# Altium PCB bms_afe_tester-1_1.PcbDoc (part 6 of 6)
Units mm, origin at the board's own origin, x right, y up, seen from the top; angles counter-clockwise.
Board outline 410 x 67 mm, 4 copper layers (L1, L2, L3, L4), stack 1.586 mm thick; 598 components, 356 nets, 1901 pads, 1542 vias.
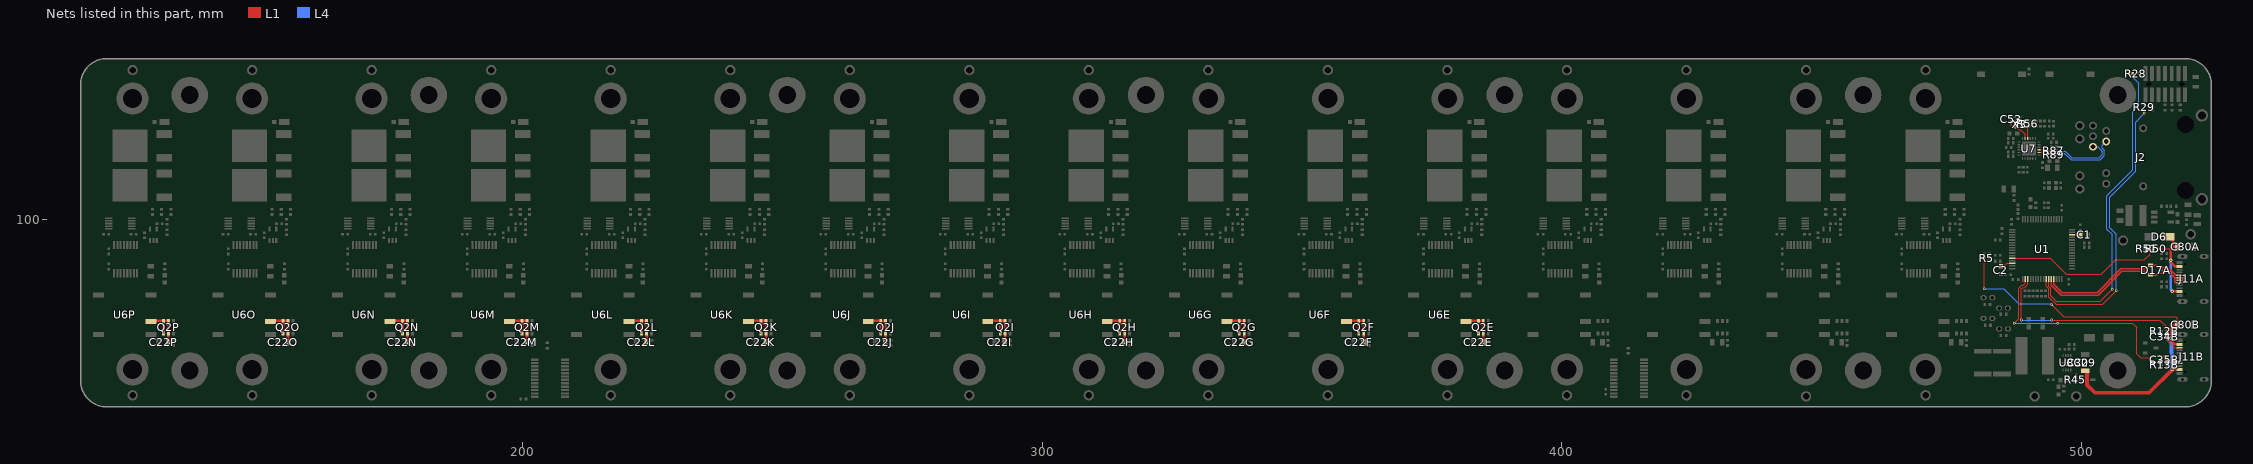
[diagram p7: the nets of this part, all layers, seen from the top]

## Via types
v1: diameter 0.5, hole 0.3, L1 to L4, 1524 vias
v2: diameter 0.65, hole 0.3, L1 to L4, 10 vias
v3: diameter 0.9, hole 0.6, L1 to L4, 8 vias

## Nets (pads, with @x,y where several pads share a name; then routed paths per layer and width w, separated by ;. In a path a pad name is that pad's centre, name@x,y a point inside that pad or via, vN(x,y) a via of type N, cw(c..) or ccw(c..) an arc to the next point about the centre after c; other vN are vias at no path point) (continued)
SWITCHEDE: C22E.1 Q2E.1 Q2E.2 Q2E.5 Q2E.6 U6E.2 | length 10
  L1 w0.5: U6E.2@381.55,80.43 381.645,80.525 Q2E.6@383.95,80.525 ; Q2E.1@383.95,78.075 Q2E.6@383.95,80.525 ; C22E.1@384.85,76.4 384.9,76.45 Q2E.2@384.9,78.075 Q2E.5@384.9,80.525 Q2E.6@383.95,80.525
SWITCHEDF: C22F.1 Q2F.1 Q2F.2 Q2F.5 Q2F.6 U6F.2 | length 10
  L1 w0.5: U6F.2@358.55,80.43 358.645,80.525 Q2F.6@360.95,80.525 ; Q2F.1@360.95,78.075 Q2F.6@360.95,80.525 ; C22F.1@361.85,76.4 361.9,76.45 Q2F.2@361.9,78.075 Q2F.5@361.9,80.525 Q2F.6@360.95,80.525
SWITCHEDG: C22G.1 Q2G.1 Q2G.2 Q2G.5 Q2G.6 U6G.2 | length 10
  L1 w0.5: U6G.2@335.55,80.43 335.645,80.525 Q2G.6@337.95,80.525 ; Q2G.1@337.95,78.075 Q2G.6@337.95,80.525 ; C22G.1@338.85,76.4 338.9,76.45 Q2G.2@338.9,78.075 Q2G.5@338.9,80.525 Q2G.6@337.95,80.525
SWITCHEDH: C22H.1 Q2H.1 Q2H.2 Q2H.5 Q2H.6 U6H.2 | length 10
  L1 w0.5: U6H.2@312.55,80.43 312.645,80.525 Q2H.6@314.95,80.525 ; Q2H.1@314.95,78.075 Q2H.6@314.95,80.525 ; C22H.1@315.85,76.4 315.9,76.45 Q2H.2@315.9,78.075 Q2H.5@315.9,80.525 Q2H.6@314.95,80.525
SWITCHEDI: C22I.1 Q2I.1 Q2I.2 Q2I.5 Q2I.6 U6I.2 | length 10
  L1 w0.5: U6I.2@289.55,80.43 289.645,80.525 Q2I.6@291.95,80.525 ; Q2I.1@291.95,78.075 Q2I.6@291.95,80.525 ; C22I.1@292.85,76.4 292.9,76.45 Q2I.2@292.9,78.075 Q2I.5@292.9,80.525 Q2I.6@291.95,80.525
SWITCHEDJ: C22J.1 Q2J.1 Q2J.2 Q2J.5 Q2J.6 U6J.2 | length 10
  L1 w0.5: U6J.2@266.55,80.43 266.645,80.525 Q2J.6@268.95,80.525 ; Q2J.1@268.95,78.075 Q2J.6@268.95,80.525 ; C22J.1@269.85,76.4 269.9,76.45 Q2J.2@269.9,78.075 Q2J.5@269.9,80.525 Q2J.6@268.95,80.525
SWITCHEDK: C22K.1 Q2K.1 Q2K.2 Q2K.5 Q2K.6 U6K.2 | length 10
  L1 w0.5: U6K.2@243.55,80.43 243.645,80.525 Q2K.6@245.95,80.525 ; Q2K.1@245.95,78.075 Q2K.6@245.95,80.525 ; C22K.1@246.85,76.4 246.9,76.45 Q2K.2@246.9,78.075 Q2K.5@246.9,80.525 Q2K.6@245.95,80.525
SWITCHEDL: C22L.1 Q2L.1 Q2L.2 Q2L.5 Q2L.6 U6L.2 | length 10
  L1 w0.5: U6L.2@220.55,80.43 220.645,80.525 Q2L.6@222.95,80.525 ; Q2L.1@222.95,78.075 Q2L.6@222.95,80.525 ; C22L.1@223.85,76.4 223.9,76.45 Q2L.2@223.9,78.075 Q2L.5@223.9,80.525 Q2L.6@222.95,80.525
SWITCHEDM: C22M.1 Q2M.1 Q2M.2 Q2M.5 Q2M.6 U6M.2 | length 10
  L1 w0.5: U6M.2@197.55,80.43 197.645,80.525 Q2M.6@199.95,80.525 ; Q2M.1@199.95,78.075 Q2M.6@199.95,80.525 ; C22M.1@200.85,76.4 200.9,76.45 Q2M.2@200.9,78.075 Q2M.5@200.9,80.525 Q2M.6@199.95,80.525
SWITCHEDN: C22N.1 Q2N.1 Q2N.2 Q2N.5 Q2N.6 U6N.2 | length 10
  L1 w0.5: U6N.2@174.55,80.43 174.645,80.525 Q2N.6@176.95,80.525 ; Q2N.1@176.95,78.075 Q2N.6@176.95,80.525 ; C22N.1@177.85,76.4 177.9,76.45 Q2N.2@177.9,78.075 Q2N.5@177.9,80.525 Q2N.6@176.95,80.525
SWITCHEDO: C22O.1 Q2O.1 Q2O.2 Q2O.5 Q2O.6 U6O.2 | length 10
  L1 w0.5: U6O.2@151.55,80.43 151.645,80.525 Q2O.6@153.95,80.525 ; Q2O.1@153.95,78.075 Q2O.6@153.95,80.525 ; C22O.1@154.85,76.4 154.9,76.45 Q2O.2@154.9,78.075 Q2O.5@154.9,80.525 Q2O.6@153.95,80.525
SWITCHEDP: C22P.1 Q2P.1 Q2P.2 Q2P.5 Q2P.6 U6P.2 | length 10
  L1 w0.5: U6P.2@128.55,80.43 128.645,80.525 Q2P.6@130.95,80.525 ; Q2P.1@130.95,78.075 Q2P.6@130.95,80.525 ; C22P.1@131.85,76.4 131.9,76.45 Q2P.2@131.9,78.075 Q2P.5@131.9,80.525 Q2P.6@130.95,80.525
TX_N: J2.2 R89.2 U7.20 | length 17.6
  L1 w0.218: U7.20@491.85,112.95 492.45,112.95 492.8,112.6 v1(493.4,112.6) R89.2@494.1,112.6
  L4 w0.218: v1(493.4,112.6) 493.591,112.791 496.7,112.791 497.991,111.5 503.591,111.5 504.418,112.327 504.418,113.373 503.996,113.796 503.996,114.284 J2.2@504.76,115.048
TX_P: J2.9 R87.2 U7.21 | length 17.3
  L1 w0.218: U7.21@491.85,113.45 492.75,113.45 v1(492.8,113.4) 494.1,113.4 R87.2@494.2,113.3
  L4 w0.218: v1(492.8,113.4) 492.991,113.209 496.873,113.209 498.164,111.918 503.418,111.918 504,112.5 504,113.2 503.168,114.032 J2.9@502.22,114.032
UART1_VCP_RX_2: R28.1 U1.43 | length 62.5
  L1 w0.203: U1.43@493.7,88.6 493.7,87.201 494.075,86.826 494.075,85.325 495.1,84.3 503.6,84.3 v1(505.9,86.6) ; v1(509.2,128.1) R28.1@509.9,128.1
  L4 w0.203: v1(505.9,86.6) 505.9,97.2 504.9,98.2 504.9,104.6 509.9,109.6 509.9,120.8 511,121.9 511,126.3 v1(509.2,128.1)
UART1_VCP_TX_2: R29.1 U1.42 | length 56.5
  L1 w0.2: U1.42@493.2,88.6 493.2,87.2 493.7,86.7 493.7,85.1 495.1,83.7 504.1,83.7 v1(506.7,86.3) ; v1(512.1,120.5) R29.1@512.1,121.1
  L4 w0.2: v1(506.7,86.3) 506.7,97.2 505.4,98.5 505.4,104.3 510.4,109.3 510.4,118.8 v1(512.1,120.5)
UCPD1.CC1_1: C35B.1 J11B.A5 R13B.1 U1.34 | length 49.3
  L1 w0.2: v1(487.1,80.1) 487.9,80.9 487.9,86.8 488.5,87.4 488.8,87.4 489.2,87.8 U1.34@489.2,88.6 ; v1(495.4,80.1) 509.8,80.1 510.6,79.3 510.6,74.2 511.4,73.4 513,73.4 513.5,73.9 516.2,73.9 516.4,73.7 C35B.1@516.4,73.1 ; R13B.1@516.4,72.1 C35B.1@516.4,73.1 ; J11B.A5@518.85,72.35 518.05,72.35 517.3,73.1 C35B.1@516.4,73.1
  L4 w0.2: v1(487.1,80.1) v1(495.4,80.1)
UCPD1.CC2_1: C34B.1 J11B.B5 R12B.1 U1.35 | length 42.9
  L1 w0.2: v1(488.4,80.7) 488.4,86.7 488.6,86.9 489,86.9 489.7,87.6 U1.35@489.7,88.6 ; v1(494.3,80.7) 515.1,80.7 516.4,79.4 R12B.1@516.4,78.5 C34B.1@516.4,77.5 516.4,76.8 517.85,75.35 J11B.B5@518.85,75.35
  L4 w0.2: v1(488.4,80.7) v1(494.3,80.7)
USB._1_N: D17A.2 J11A.A7 J11A.B7 U1.44 | length 31.4
  L1 w0.284: U1.44@494.2,88.6 494.208,88.592 494.208,87.383 496.1,85.491 503.225,85.491 507.792,90.058 512.567,90.058 D17A.2@513.275,89.35 514.375,89.35 514.731,89.706 515.973,89.706 516.325,90.058 516.717,90.058 517.925,88.85 ; J11A.B7@518.85,87.85 518.125,87.85 517.925,88.05 517.925,88.85 ; J11A.A7@518.85,88.85 517.925,88.85
USB._1_P: D17A.1 J11A.A6 J11A.B6 U1.45 | length 31.3
  L1 w0.2: J11A.A6@518.85,88.35 519.55,88.35 519.7,88.5 519.7,89.2 519.55,89.35 J11A.B6@518.85,89.35
  L1 w0.284: U1.45@494.7,88.6 494.692,88.592 494.692,87.583 496.3,85.975 503.025,85.975 507.592,90.542 512.567,90.542 D17A.1@513.275,91.25 514.375,91.25 514.731,90.894 515.925,90.894 516.277,90.542 516.917,90.542 518.109,89.35 J11A.B6@518.85,89.35
VBUS: C29.1 C30.1 C80B.1 J11B.A4 J11B.B4 R5.2 R45.1 U8.1 | length 84.5
  L1 w0.2: v1@481.3,86.6 R5.2@481.3,92.6 ; v1(494.3,83.6) 496.6,81.3 518.2,81.3 518.45,81.05 C80B.1@518.45,79.8 ; R45.1@498.8,69.7 499,69.9 499,70.5
  L1 w0.3: U8.1@497.7,72 C30.1@499.4,72
  L1 w0.5: v2(517.5,71.2) J11B.A4@518.85,71.2 ; C80B.1@518.45,79.8 517.6,79.8 517.2,79.4 v2(517.2,77.2) 517.2,76.8 518,76 J11B.B4@518.85,76
  L1 w0.75: C29.1@500.7,70.95 501.1,70.55 501.1,68.2 502.6,66.7 513,66.7 v2(517.5,71.2)
  L4 w0.2: v1(481.3,86.7) 485,86.7 487.9,83.8 494.1,83.8 v1(494.3,83.6)
  L4 w0.75: v2(517.2,77.2) v2(517.5,71.2)
VBUS_DATA_1: C80A.1 D6.1 J11A.A4 J11A.B4 R50.2 | length 18
  L1 w0.2: R50.2@514.9,94.4 517.2,94.4
  L1 w0.5: D6.1@516.85,96.7 517.6,95.95 517.6,94.8 ; v2(517.5,86.2) J11A.A4@518.85,86.2 ; C80A.1@518.45,94.8 517.6,94.8 ; J11A.B4@518.85,91 518,91 517.2,91.8 v2(517.2,92.2) 517.2,94.4 517.6,94.8
  L4 w0.5: v2(517.2,92.2) 517.2,86.5 v2(517.5,86.2)
VBUS_DATA_SENSE_1: R50.1 R51.2 U1.28 | length 31.2
  L1 w0.2: U1.28@486.7,92.6 494,92.6 497.1,89.5 503.8,89.5 506.6,92.3 512.1,92.3 513.1,93.3 R51.2@513.1,94.4 R50.1@513.9,94.4
VCAP_1_2: C2.1 U1.30 | length 2.4
  L1 w0.2: C2.1@484.5,91.05 485.05,91.05 485.6,91.6 U1.30@486.7,91.6
VCAP_2_2: C1.1 U1.62 | length 1.6
  L1 w0.203: U1.62@498.2,97.1 C1.1@499.75,97.1
XTAL1: C53.1 U7.5 X3.3 | length 4.8
  L1 w0.203: C53.1@486.5,118.8 486.5,118.1 486.7,117.9 X3.3@487.425,117.9 488.025,117.3 488.3,117.3 489.15,116.45 U7.5@489.15,115.65
XTAL2: R56.1 U7.4 | length 2.4
  L1 w0.218: U7.4@489.65,115.65 489.65,117.95 R56.1@489.7,118
pads on no net: J1.0 J1.1 J1.2 J1.9 J1.10 J2.0 J2.5 J2.6 J2.10 J2.11 J11A.A8 J11A.B8 J11A.GP J11B.A8 J11B.B8 J11B.GP MH1.1 MH2.1 MH3.1 MH4.1 MH5.1 MH6.1 MH7.1 MH8.1 MH9.1 MH10.1 MH11.1 MH12.1 MH13.1 MH14.1 U1.2 U1.3 U1.4 U1.8 U1.10 U1.14 U1.20 U1.22 U1.26 U1.50 U1.51 U1.52 U1.53 U1.54 U1.56 U1.57 U1.61 U4A.6 U4B.6 U4C.6 U4D.6 U4E.6 U4F.6 U4G.6 U4H.6 U4I.6 U4J.6 U4K.6 U4L.6 U4M.6 U4N.6 U4O.6 U4P.6 U5A.3 U5A.9 U5B.3 U5B.9 U5C.3 U5C.9 U5D.3 U5D.9 U5E.3 U5E.9 U5F.3 U5F.9 U5G.3 U5G.9 U5H.3 U5H.9 U5I.3 U5I.9 U5J.3 U5J.9 U5K.3 U5K.9 U5L.3 U5L.9 U5M.3 U5M.9 U5N.3 U5N.9 U5O.3 U5O.9 U5P.3 U5P.9 U6A.8 U6B.8 U6C.8 U6D.8 U6E.8 U6F.8 U6G.8 U6H.8 U6I.8 U6J.8 U6K.8 U6L.8 U6M.8 U6N.8 U6O.8 U6P.8 U7.10 U8.3 U8.6

## Polygon pours and split planes (outlines as drawn)
BIASE on L1 "NONET_L01_P-001" (solid, remove dead copper, pour order 77): 380.9,110.2 370.1,110.2 370.1,85 372.5,85 372.5,95 373.9,95 373.9,96.5 371.9,96.5 371.9,101 380.9,101
BIASP on L1 "NONET_L01_P-001" (solid, remove dead copper, pour order 76): 127.9,110.2 117.1,110.2 117.1,85 119.5,85 119.5,95 120.9,95 120.9,96.5 118.9,96.5 118.9,101 127.9,101
BIASO on L1 "NONET_L01_P-001" (solid, remove dead copper, pour order 75): 150.9,110.2 140.1,110.2 140.1,85 142.5,85 142.5,95 143.9,95 143.9,96.5 141.9,96.5 141.9,101 150.9,101
BIASN on L1 "NONET_L01_P-001" (solid, remove dead copper, pour order 74): 173.9,110.2 163.1,110.2 163.1,85 165.5,85 165.5,95 166.9,95 166.9,96.5 164.9,96.5 164.9,101 173.9,101
BIASM on L1 "NONET_L01_P-001" (solid, remove dead copper, pour order 73): 196.9,110.2 186.1,110.2 186.1,85 188.5,85 188.5,95 189.9,95 189.9,96.5 187.9,96.5 187.9,101 196.9,101
BIASL on L1 "NONET_L01_P-001" (solid, remove dead copper, pour order 72): 219.9,110.2 209.1,110.2 209.1,85 211.5,85 211.5,95 212.9,95 212.9,96.5 210.9,96.5 210.9,101 219.9,101
BIASK on L1 "NONET_L01_P-001" (solid, remove dead copper, pour order 71): 242.9,110.2 232.1,110.2 232.1,85 234.5,85 234.5,95 235.9,95 235.9,96.5 233.9,96.5 233.9,101 242.9,101
BIASJ on L1 "NONET_L01_P-001" (solid, remove dead copper, pour order 70): 265.9,110.2 255.1,110.2 255.1,85 257.5,85 257.5,95 258.9,95 258.9,96.5 256.9,96.5 256.9,101 265.9,101
BIASI on L1 "NONET_L01_P-001" (solid, remove dead copper, pour order 69): 288.9,110.2 278.1,110.2 278.1,85 280.5,85 280.5,95 281.9,95 281.9,96.5 279.9,96.5 279.9,101 288.9,101
BIASH on L1 "NONET_L01_P-001" (solid, remove dead copper, pour order 68): 311.9,110.2 301.1,110.2 301.1,85 303.5,85 303.5,95 304.9,95 304.9,96.5 302.9,96.5 302.9,101 311.9,101
BIASG on L1 "NONET_L01_P-001" (solid, remove dead copper, pour order 67): 334.9,110.2 324.1,110.2 324.1,85 326.5,85 326.5,95 327.9,95 327.9,96.5 325.9,96.5 325.9,101 334.9,101
BIASF on L1 "NONET_L01_P-001" (solid, remove dead copper, pour order 66): 357.9,110.2 347.1,110.2 347.1,85 349.5,85 349.5,95 350.9,95 350.9,96.5 348.9,96.5 348.9,101 357.9,101
BIASD on L1 "NONET_L01_P-001" (solid, remove dead copper, pour order 65): 403.9,110.2 393.1,110.2 393.1,85 395.5,85 395.5,95 396.9,95 396.9,96.5 394.9,96.5 394.9,101 403.9,101
BIASC on L1 "NONET_L01_P-001" (solid, remove dead copper, pour order 64): 426.9,110.2 416.1,110.2 416.1,85 418.5,85 418.5,95 419.9,95 419.9,96.5 417.9,96.5 417.9,101 426.9,101
BIASB on L1 "NONET_L01_P-001" (solid, remove dead copper, pour order 63): 449.9,110.2 439.1,110.2 439.1,85 441.5,85 441.5,95 442.9,95 442.9,96.5 440.9,96.5 440.9,101 449.9,101
BIASA on L1 "NONET_L01_P-001" (solid, remove dead copper, pour order 62): 472.9,110.2 462.1,110.2 462.1,85 464.5,85 464.5,95 465.9,95 465.9,96.5 463.9,96.5 463.9,101 472.9,101
3P3 on L1 "3P3_L01_P044" (solid, remove dead copper, pour order 44): 505.9,100.4 508.3,100.4 508.3,102.9 509.9,102.9 509.9,98.7 505.9,98.7
3P3 on L1 "3P3_L01_P042" (solid, remove dead copper, pour order 42): 505.9,100.4 508.3,100.4 508.3,102.9 509.9,102.9 509.9,98.7 505.9,98.7
GND on L1 "GND_L01_P039" (solid, remove dead copper, pour order 39): 498.7,72.8 502.7,72.8 502.7,75.5 498.7,75.5
C4_1_N on L1 "NONET_L01_P-001" (solid, remove dead copper, pour order 125): 380.5,85 385.9,85 385.9,87.1 383.4,87.1 383.4,88.3 380.5,88.3
C4_1_N on L1 "NONET_L01_P-001" (solid, remove dead copper, pour order 61): 380.9,110.6 370.1,110.6 370.1,119.9 380.9,119.9
C15_1_N on L1 "NONET_L01_P-001" (solid, remove dead copper, pour order 60): 127.9,110.6 117.1,110.6 117.1,119.9 127.9,119.9
C14_1_N on L1 "NONET_L01_P-001" (solid, remove dead copper, pour order 59): 150.9,110.6 140.1,110.6 140.1,119.9 150.9,119.9
C13_1_N on L1 "NONET_L01_P-001" (solid, remove dead copper, pour order 58): 173.9,110.6 163.1,110.6 163.1,119.9 173.9,119.9
C12_1_N on L1 "NONET_L01_P-001" (solid, remove dead copper, pour order 57): 196.9,110.6 186.1,110.6 186.1,119.9 196.9,119.9
C11_1_N on L1 "NONET_L01_P-001" (solid, remove dead copper, pour order 56): 219.9,110.6 209.1,110.6 209.1,119.9 219.9,119.9
C10_1_N on L1 "NONET_L01_P-001" (solid, remove dead copper, pour order 55): 242.9,110.6 232.1,110.6 232.1,119.9 242.9,119.9
C9_1_N on L1 "NONET_L01_P-001" (solid, remove dead copper, pour order 54): 265.9,110.6 255.1,110.6 255.1,119.9 265.9,119.9
C8_1_N on L1 "NONET_L01_P-001" (solid, remove dead copper, pour order 53): 288.9,110.6 278.1,110.6 278.1,119.9 288.9,119.9
C7_1_N on L1 "NONET_L01_P-001" (solid, remove dead copper, pour order 52): 311.9,110.6 301.1,110.6 301.1,119.9 311.9,119.9
C6_1_N on L1 "NONET_L01_P-001" (solid, remove dead copper, pour order 51): 334.9,110.6 324.1,110.6 324.1,119.9 334.9,119.9
C5_1_N on L1 "NONET_L01_P-001" (solid, remove dead copper, pour order 50): 357.9,110.6 347.1,110.6 347.1,119.9 357.9,119.9
C3_1_N on L1 "NONET_L01_P-001" (solid, remove dead copper, pour order 49): 403.9,110.6 393.1,110.6 393.1,119.9 403.9,119.9
C2_1_N on L1 "NONET_L01_P-001" (solid, remove dead copper, pour order 48): 426.9,110.6 416.1,110.6 416.1,119.9 426.9,119.9
C1_1_N on L1 "NONET_L01_P-001" (solid, remove dead copper, pour order 47): 449.9,110.6 439.1,110.6 439.1,119.9 449.9,119.9
C15_1_N on L1 "NONET_L01_P-001" (solid, remove dead copper, pour order 124): 127.5,85 132.9,85 132.9,87.1 130.4,87.1 130.4,88.3 127.5,88.3
C14_1_N on L1 "NONET_L01_P-001" (solid, remove dead copper, pour order 123): 150.5,85 155.9,85 155.9,87.1 153.4,87.1 153.4,88.3 150.5,88.3
C13_1_N on L1 "NONET_L01_P-001" (solid, remove dead copper, pour order 122): 173.5,85 178.9,85 178.9,87.1 176.4,87.1 176.4,88.3 173.5,88.3
C12_1_N on L1 "NONET_L01_P-001" (solid, remove dead copper, pour order 121): 196.5,85 201.9,85 201.9,87.1 199.4,87.1 199.4,88.3 196.5,88.3
C11_1_N on L1 "NONET_L01_P-001" (solid, remove dead copper, pour order 120): 219.5,85 224.9,85 224.9,87.1 222.4,87.1 222.4,88.3 219.5,88.3
C10_1_N on L1 "NONET_L01_P-001" (solid, remove dead copper, pour order 119): 242.5,85 247.9,85 247.9,87.1 245.4,87.1 245.4,88.3 242.5,88.3
C9_1_N on L1 "NONET_L01_P-001" (solid, remove dead copper, pour order 118): 265.5,85 270.9,85 270.9,87.1 268.4,87.1 268.4,88.3 265.5,88.3
C8_1_N on L1 "NONET_L01_P-001" (solid, remove dead copper, pour order 117): 288.5,85 293.9,85 293.9,87.1 291.4,87.1 291.4,88.3 288.5,88.3
C7_1_N on L1 "NONET_L01_P-001" (solid, remove dead copper, pour order 116): 311.5,85 316.9,85 316.9,87.1 314.4,87.1 314.4,88.3 311.5,88.3
C6_1_N on L1 "NONET_L01_P-001" (solid, remove dead copper, pour order 115): 334.5,85 339.9,85 339.9,87.1 337.4,87.1 337.4,88.3 334.5,88.3
C5_1_N on L1 "NONET_L01_P-001" (solid, remove dead copper, pour order 114): 357.5,85 362.9,85 362.9,87.1 360.4,87.1 360.4,88.3 357.5,88.3
C3_1_N on L1 "NONET_L01_P-001" (solid, remove dead copper, pour order 113): 403.5,85 408.9,85 408.9,87.1 406.4,87.1 406.4,88.3 403.5,88.3
C2_1_N on L1 "NONET_L01_P-001" (solid, remove dead copper, pour order 112): 426.5,85 431.9,85 431.9,87.1 429.4,87.1 429.4,88.3 426.5,88.3
C1_1_N on L1 "NONET_L01_P-001" (solid, remove dead copper, pour order 111): 449.5,85 454.9,85 454.9,87.1 452.4,87.1 452.4,88.3 449.5,88.3
C0_1_N on L1 "NONET_L01_P-001" (solid, remove dead copper, pour order 46): 472.9,110.6 462.1,110.6 462.1,119.9 472.9,119.9
C0_1_N on L1 "NONET_L01_P-001" (solid, remove dead copper, pour order 110): 472.5,85 477.9,85 477.9,87.1 475.4,87.1 475.4,88.3 472.5,88.3
GND on L1 "GND_L01_P043" (solid, remove dead copper, pour order 43): 508.1,101.2 508.1,102.9 505.9,102.9 505.9,101.2
GND on L1 "GND_L01_P045" (solid, remove dead copper, pour order 45): 508.1,101.2 508.1,102.9 505.9,102.9 505.9,101.2
GND on L1 "GND_L01_P041" (solid, remove dead copper, pour order 41): 486.5,73.5 479.1,73.5 479.1,75.9 486.5,75.9
5P0 on L1 "5P0_L01_P040" (solid, remove dead copper, pour order 40): 486.8,78 486.8,71.6 479.1,71.6 479.1,69.1 490,69.1 490,78
VBUS on L1 "VBUS_L01_P038" (solid, remove dead copper, pour order 38): 498.7,72.2 502.7,72.2 502.7,70.2 498.7,70.2
GND on L2 "NONET_L01_P-001" (solid, remove dead copper, pour order 126): 115,69 ccw(c120,69) 120,64 520,64 ccw(c520,69) 525,69 525,126 ccw(c520,126) 520,131 120,131 ccw(c120,126) 115,126
C4_1_N on L2 "NONET_L01_P-001" (solid, remove dead copper, pour order 93): 370.1,119.9 385.9,119.9 385.9,85 380.5,85 380.5,92.5 370.1,92.5
C0_1_N on L2 "NONET_L01_P-001" (solid, remove dead copper, pour order 92): 462.1,119.9 477.9,119.9 477.9,85 472.5,85 472.5,92.5 462.1,92.5
C15_1_N on L2 "NONET_L01_P-001" (solid, remove dead copper, pour order 91): 117.1,119.9 132.9,119.9 132.9,85 127.5,85 127.5,92.5 117.1,92.5
C14_1_N on L2 "NONET_L01_P-001" (solid, remove dead copper, pour order 90): 140.1,119.9 155.9,119.9 155.9,85 150.5,85 150.5,92.5 140.1,92.5
C13_1_N on L2 "NONET_L01_P-001" (solid, remove dead copper, pour order 89): 163.1,119.9 178.9,119.9 178.9,85 173.5,85 173.5,92.5 163.1,92.5
C12_1_N on L2 "NONET_L01_P-001" (solid, remove dead copper, pour order 88): 186.1,119.9 201.9,119.9 201.9,85 196.5,85 196.5,92.5 186.1,92.5
C11_1_N on L2 "NONET_L01_P-001" (solid, remove dead copper, pour order 87): 209.1,119.9 224.9,119.9 224.9,85 219.5,85 219.5,92.5 209.1,92.5
C10_1_N on L2 "NONET_L01_P-001" (solid, remove dead copper, pour order 86): 232.1,119.9 247.9,119.9 247.9,85 242.5,85 242.5,92.5 232.1,92.5
C9_1_N on L2 "NONET_L01_P-001" (solid, remove dead copper, pour order 85): 255.1,119.9 270.9,119.9 270.9,85 265.5,85 265.5,92.5 255.1,92.5
C8_1_N on L2 "NONET_L01_P-001" (solid, remove dead copper, pour order 84): 278.1,119.9 293.9,119.9 293.9,85 288.5,85 288.5,92.5 278.1,92.5
C7_1_N on L2 "NONET_L01_P-001" (solid, remove dead copper, pour order 83): 301.1,119.9 316.9,119.9 316.9,85 311.5,85 311.5,92.5 301.1,92.5
C6_1_N on L2 "NONET_L01_P-001" (solid, remove dead copper, pour order 82): 324.1,119.9 339.9,119.9 339.9,85 334.5,85 334.5,92.5 324.1,92.5
C5_1_N on L2 "NONET_L01_P-001" (solid, remove dead copper, pour order 81): 347.1,119.9 362.9,119.9 362.9,85 357.5,85 357.5,92.5 347.1,92.5
C3_1_N on L2 "NONET_L01_P-001" (solid, remove dead copper, pour order 80): 393.1,119.9 408.9,119.9 408.9,85 403.5,85 403.5,92.5 393.1,92.5
C2_1_N on L2 "NONET_L01_P-001" (solid, remove dead copper, pour order 79): 416.1,119.9 431.9,119.9 431.9,85 426.5,85 426.5,92.5 416.1,92.5
C1_1_N on L2 "NONET_L01_P-001" (solid, remove dead copper, pour order 78): 439.1,119.9 454.9,119.9 454.9,85 449.5,85 449.5,92.5 439.1,92.5
5P0 on L3 "NONET_L01_P-001" (solid, remove dead copper, pour order 128): 497,75.5 497,79 525,79 525,69 cw(c520,69) 520,64 120,64 cw(c120,69) 115,69 115,81 204.5,81 204.5,80 206.5,80 206.5,81 412.5,81 412.5,80 414.5,80 414.5,81 479,81 479,75.5
3P3 on L3 "NONET_L01_P-001" (solid, remove dead copper, pour order 127): 120,92 127,92 127,84.5 143,84.5 143,92 150,92 150,84.5 166,84.5 166,92 173,92 173,84.5 189,84.5 189,92 196,92 196,84.5 212,84.5 212,92 219,92 219,84.5 235,84.5 235,92 242,92 242,84.5 258,84.5 258,92 265,92 265,84.5 281,84.5 281,92 288,92 288,84.5 304,84.5 304,92 311,92 311,84.5 327,84.5 327,92 334,92 334,84.5 350,84.5 350,92 357,92 357,84.5 373,84.5 373,92 380,92 380,84.5 396,84.5 396,92 403,92 403,84.5 419,84.5 419,92 426,92 426,84.5 442,84.5 442,92 449,92 449,84.5 465,84.5 465,92 472,92 472,84.5 479,84.5 479,131 520,131 cw(c520,126) 525,126 525,79.5 496.5,79.5 496.5,76 479.5,76 479.5,81.5 414,81.5 414,80.5 413,80.5 413,81.5 206,81.5 206,80.5 205,80.5 205,81.5 120,81.5
BIASE on L3 "NONET_L01_P-001" (solid, remove dead copper, pour order 109): 370.1,119.9 385.9,119.9 385.9,85 380.5,85 380.5,92.5 372.5,92.5 372.5,85 370.1,85
BIASP on L3 "NONET_L01_P-001" (solid, remove dead copper, pour order 108): 117.1,119.9 132.9,119.9 132.9,85 127.5,85 127.5,92.5 119.5,92.5 119.5,85 117.1,85
BIASO on L3 "NONET_L01_P-001" (solid, remove dead copper, pour order 107): 140.1,119.9 155.9,119.9 155.9,85 150.5,85 150.5,92.5 142.5,92.5 142.5,85 140.1,85
BIASN on L3 "NONET_L01_P-001" (solid, remove dead copper, pour order 106): 163.1,119.9 178.9,119.9 178.9,85 173.5,85 173.5,92.5 165.5,92.5 165.5,85 163.1,85
BIASM on L3 "NONET_L01_P-001" (solid, remove dead copper, pour order 105): 186.1,119.9 201.9,119.9 201.9,85 196.5,85 196.5,92.5 188.5,92.5 188.5,85 186.1,85
BIASL on L3 "NONET_L01_P-001" (solid, remove dead copper, pour order 104): 209.1,119.9 224.9,119.9 224.9,85 219.5,85 219.5,92.5 211.5,92.5 211.5,85 209.1,85
BIASK on L3 "NONET_L01_P-001" (solid, remove dead copper, pour order 103): 232.1,119.9 247.9,119.9 247.9,85 242.5,85 242.5,92.5 234.5,92.5 234.5,85 232.1,85
BIASJ on L3 "NONET_L01_P-001" (solid, remove dead copper, pour order 102): 255.1,119.9 270.9,119.9 270.9,85 265.5,85 265.5,92.5 257.5,92.5 257.5,85 255.1,85
BIASI on L3 "NONET_L01_P-001" (solid, remove dead copper, pour order 101): 278.1,119.9 293.9,119.9 293.9,85 288.5,85 288.5,92.5 280.5,92.5 280.5,85 278.1,85
BIASH on L3 "NONET_L01_P-001" (solid, remove dead copper, pour order 100): 301.1,119.9 316.9,119.9 316.9,85 311.5,85 311.5,92.5 303.5,92.5 303.5,85 301.1,85
BIASG on L3 "NONET_L01_P-001" (solid, remove dead copper, pour order 99): 324.1,119.9 339.9,119.9 339.9,85 334.5,85 334.5,92.5 326.5,92.5 326.5,85 324.1,85
BIASF on L3 "NONET_L01_P-001" (solid, remove dead copper, pour order 98): 347.1,119.9 362.9,119.9 362.9,85 357.5,85 357.5,92.5 349.5,92.5 349.5,85 347.1,85
BIASD on L3 "NONET_L01_P-001" (solid, remove dead copper, pour order 97): 393.1,119.9 408.9,119.9 408.9,85 403.5,85 403.5,92.5 395.5,92.5 395.5,85 393.1,85
BIASC on L3 "NONET_L01_P-001" (solid, remove dead copper, pour order 96): 416.1,119.9 431.9,119.9 431.9,85 426.5,85 426.5,92.5 418.5,92.5 418.5,85 416.1,85
BIASB on L3 "NONET_L01_P-001" (solid, remove dead copper, pour order 95): 439.1,119.9 454.9,119.9 454.9,85 449.5,85 449.5,92.5 441.5,92.5 441.5,85 439.1,85
BIASA on L3 "NONET_L01_P-001" (solid, remove dead copper, pour order 94): 462.1,119.9 477.9,119.9 477.9,85 472.5,85 472.5,92.5 464.5,92.5 464.5,85 462.1,85
C0_1_N on L4 "NONET_L01_P-001" (solid, remove dead copper, pour order 144): 472.5,85 477.9,85 477.9,87.1 475.4,87.1 475.4,88.3 472.5,88.3
C1_1_N on L4 "NONET_L01_P-001" (solid, remove dead copper, pour order 143): 449.5,85 454.9,85 454.9,87.1 452.4,87.1 452.4,88.3 449.5,88.3
C2_1_N on L4 "NONET_L01_P-001" (solid, remove dead copper, pour order 142): 426.5,85 431.9,85 431.9,87.1 429.4,87.1 429.4,88.3 426.5,88.3
C3_1_N on L4 "NONET_L01_P-001" (solid, remove dead copper, pour order 141): 403.5,85 408.9,85 408.9,87.1 406.4,87.1 406.4,88.3 403.5,88.3
C4_1_N on L4 "NONET_L01_P-001" (solid, remove dead copper, pour order 140): 380.5,85 385.9,85 385.9,87.1 383.4,87.1 383.4,88.3 380.5,88.3
C5_1_N on L4 "NONET_L01_P-001" (solid, remove dead copper, pour order 139): 357.5,85 362.9,85 362.9,87.1 360.4,87.1 360.4,88.3 357.5,88.3
C6_1_N on L4 "NONET_L01_P-001" (solid, remove dead copper, pour order 138): 334.5,85 339.9,85 339.9,87.1 337.4,87.1 337.4,88.3 334.5,88.3
C7_1_N on L4 "NONET_L01_P-001" (solid, remove dead copper, pour order 137): 311.5,85 316.9,85 316.9,87.1 314.4,87.1 314.4,88.3 311.5,88.3
C8_1_N on L4 "NONET_L01_P-001" (solid, remove dead copper, pour order 136): 288.5,85 293.9,85 293.9,87.1 291.4,87.1 291.4,88.3 288.5,88.3
C9_1_N on L4 "NONET_L01_P-001" (solid, remove dead copper, pour order 135): 265.5,85 270.9,85 270.9,87.1 268.4,87.1 268.4,88.3 265.5,88.3
C10_1_N on L4 "NONET_L01_P-001" (solid, remove dead copper, pour order 134): 242.5,85 247.9,85 247.9,87.1 245.4,87.1 245.4,88.3 242.5,88.3
C11_1_N on L4 "NONET_L01_P-001" (solid, remove dead copper, pour order 133): 219.5,85 224.9,85 224.9,87.1 222.4,87.1 222.4,88.3 219.5,88.3
C12_1_N on L4 "NONET_L01_P-001" (solid, remove dead copper, pour order 132): 196.5,85 201.9,85 201.9,87.1 199.4,87.1 199.4,88.3 196.5,88.3
C13_1_N on L4 "NONET_L01_P-001" (solid, remove dead copper, pour order 131): 173.5,85 178.9,85 178.9,87.1 176.4,87.1 176.4,88.3 173.5,88.3
C14_1_N on L4 "NONET_L01_P-001" (solid, remove dead copper, pour order 130): 150.5,85 155.9,85 155.9,87.1 153.4,87.1 153.4,88.3 150.5,88.3
C15_1_N on L4 "NONET_L01_P-001" (solid, remove dead copper, pour order 129): 127.5,85 132.9,85 132.9,87.1 130.4,87.1 130.4,88.3 127.5,88.3

## Other copper
L1:
  region net NetC28_2: 495.3,74.2 495.3,77.4 492.4,77.4 492.4,70.2 495.3,70.2 495.3,71.7 495.9,72.3 497.4,72.3 497.4,72.7 496.8,72.7

## Silkscreen, mask and mechanical layers (free items; w line width, h text height)
Top Overlay:
  text "C14-" at 142.9,129.9 h2 r270
  text "C13+" at 165.7,129.9 h2 r270
  text "C12-" at 188.9,129.9 h2 r270
  text "C11+" at 211.7,129.9 h2 r270
  text "C10-" at 234.9,129.9 h2 r270
  text "C9+" at 258.3,129.9 h2 r270
  text "C8-" at 281.6,129.9 h2 r270
  text "C7+" at 304.3,129.9 h2 r270
  text "C6-" at 327.6,129.9 h2 r270
  text "C5+" at 350.3,129.9 h2 r270
  text "C4-" at 373.6,129.9 h2 r270
  text "C3+" at 396.2,129.9 h2 r270
  text "C2-" at 419.6,129.9 h2 r270
  text "C1+" at 442.6,129.9 h2 r270
  text "C0-" at 465.6,129.9 h2 r270
  text "C15+" at 119.7,129.8 h2 r270
  text "BOOT0" at 479.9,123.5 h2
  text "nRST" at 494.1,123.5 h2
  text "GND" at 523.7,95.8 h1 r90
  text "3P3" at 510.7,94.7 h1 r90
  text "DATA" at 518.08,81.98 h1.4
  text "POWER" at 516.88,66.88 h1.4
  text "C15-" at 121.8,65.2 h2 r90
  text "C14+" at 144.8,65.1 h2 r90
  text "C13-" at 167.8,65.1 h2 r90
  text "C12+" at 190.6,65.1 h2 r90
  text "C11-" at 214,65.1 h2 r90
  text "C10+" at 236.7,65.1 h2 r90
  text "C9-" at 260.5,65.1 h2 r90
  text "C8+" at 283.1,65.1 h2 r90
  text "C7-" at 306.5,65.1 h2 r90
  text "C6+" at 329.1,65.1 h2 r90
  text "C5-" at 352.5,65.1 h2 r90
  text "C4+" at 375.1,65.1 h2 r90
  text "C3-" at 398.6,65.1 h2 r90
  text "C2+" at 421.1,65.1 h2 r90
  text "C1-" at 444.7,65.1 h2 r90
  text "C0+" at 467.1,65.1 h2 r90
  text "5P0" at 489.4,64.8 h1 r90
  text "GND" at 501.6,64.8 h1 r90
Bottom Overlay:
  text "bms_afe_tester-1_1 / Sasha Zbrozek - zbrozek@zlnp.net / JLC04161H-7628 stackup" at 140,117 h1.2 r90
Board Shape:
  the board outline again, w0.2

## Text inside footprints (layer, text, board x,y; h text height)
J2: Top 3D Body "Enclosure" at 529.127,113.873 h0.5 r270
J11A: Top 3D Body "PCB edge" at 525.416,86.727 h0.5 r90
J11B: Top 3D Body "PCB edge" at 525.416,71.727 h0.5 r90